# Altium PCB Auxboardone.PcbDoc
Units mil, origin at the board's own origin, x right, y up, seen from the top; angles counter-clockwise.
Board outline 3330 x 1865 mil, 2 copper layers (Top Layer, Bottom Layer); 27 components, 19 nets, 123 pads, 16 vias.
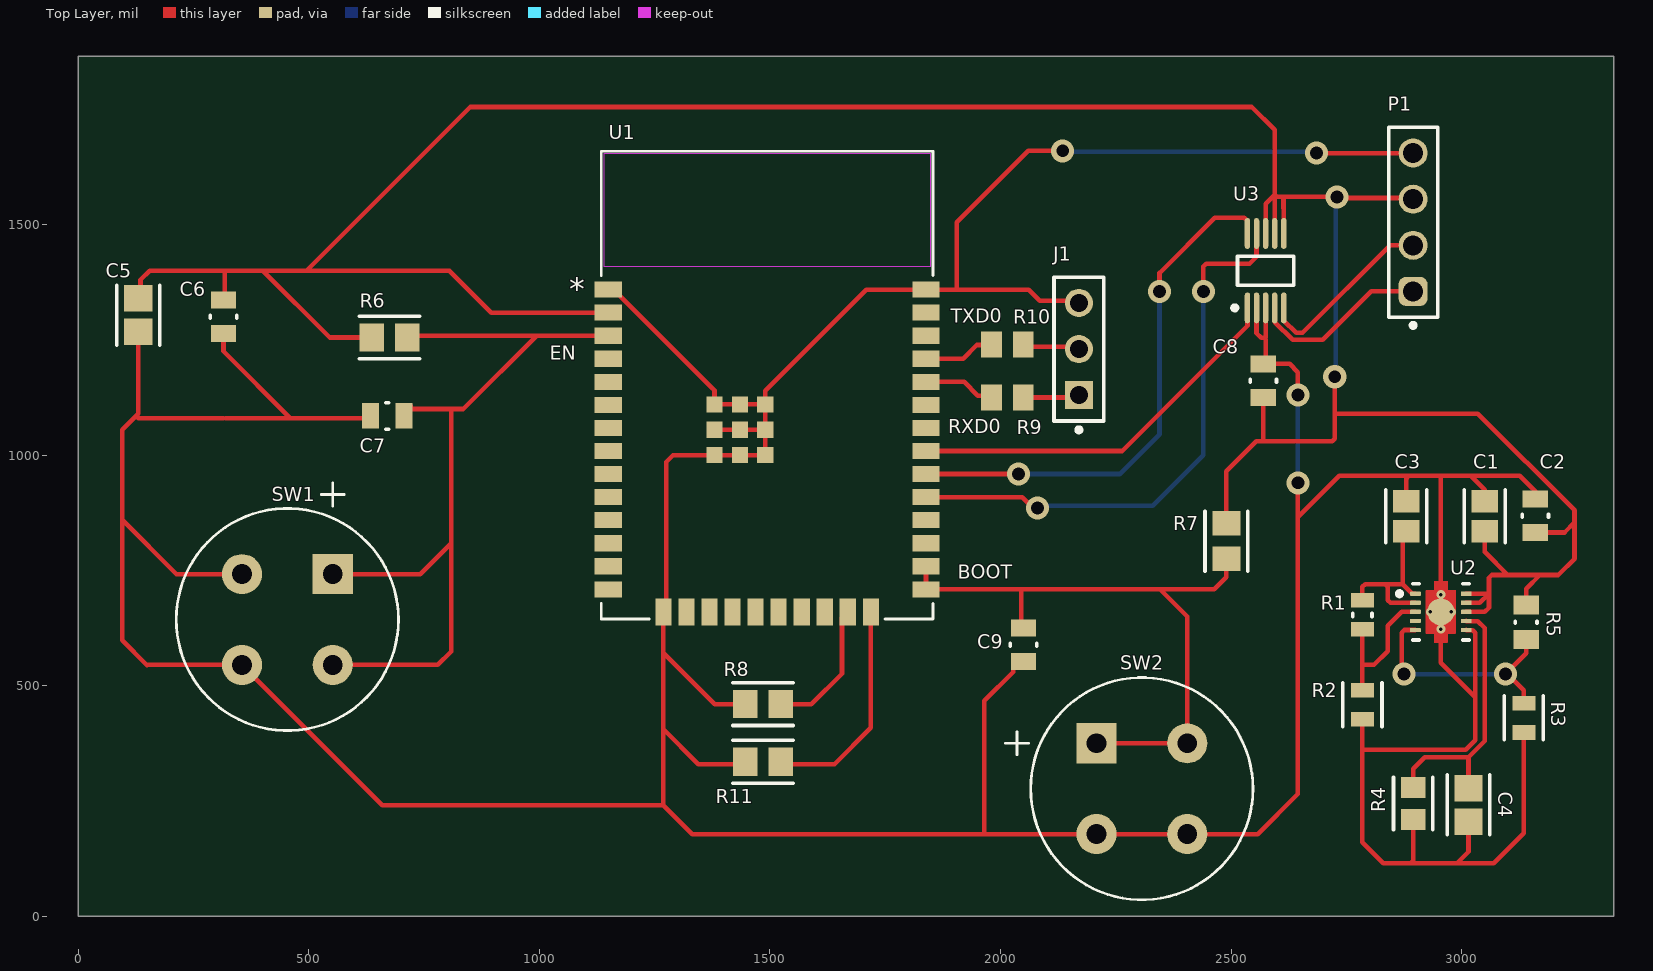
[diagram p0: Top Layer view]
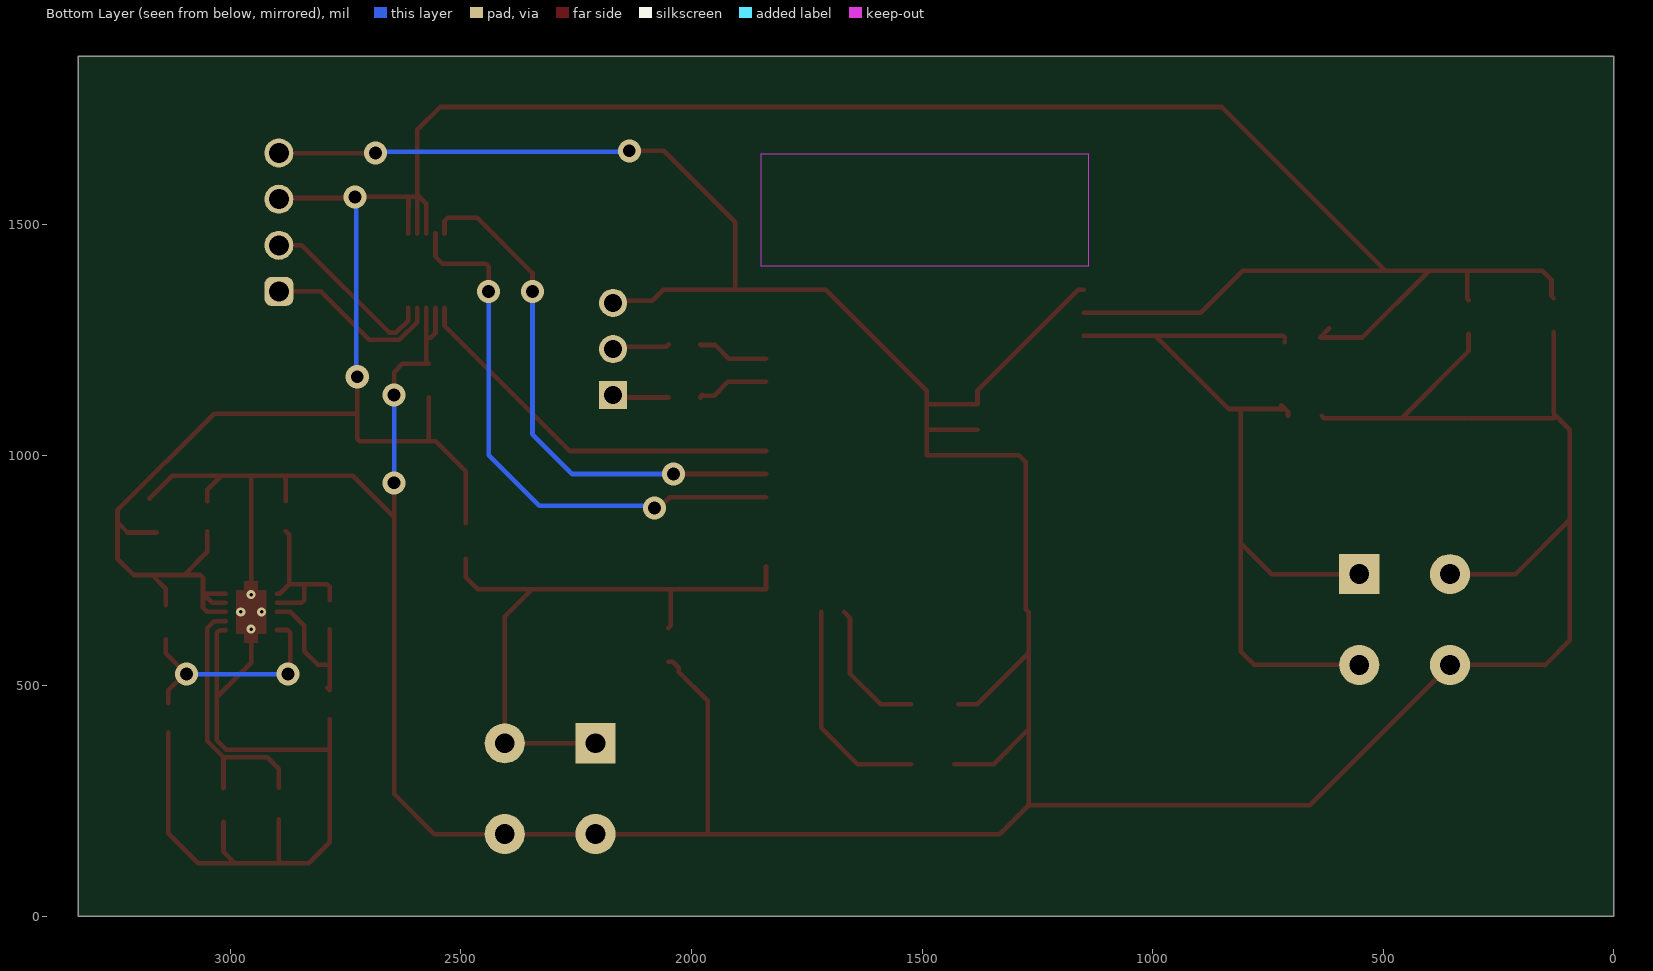
[diagram p1: Bottom Layer view, seen from below]
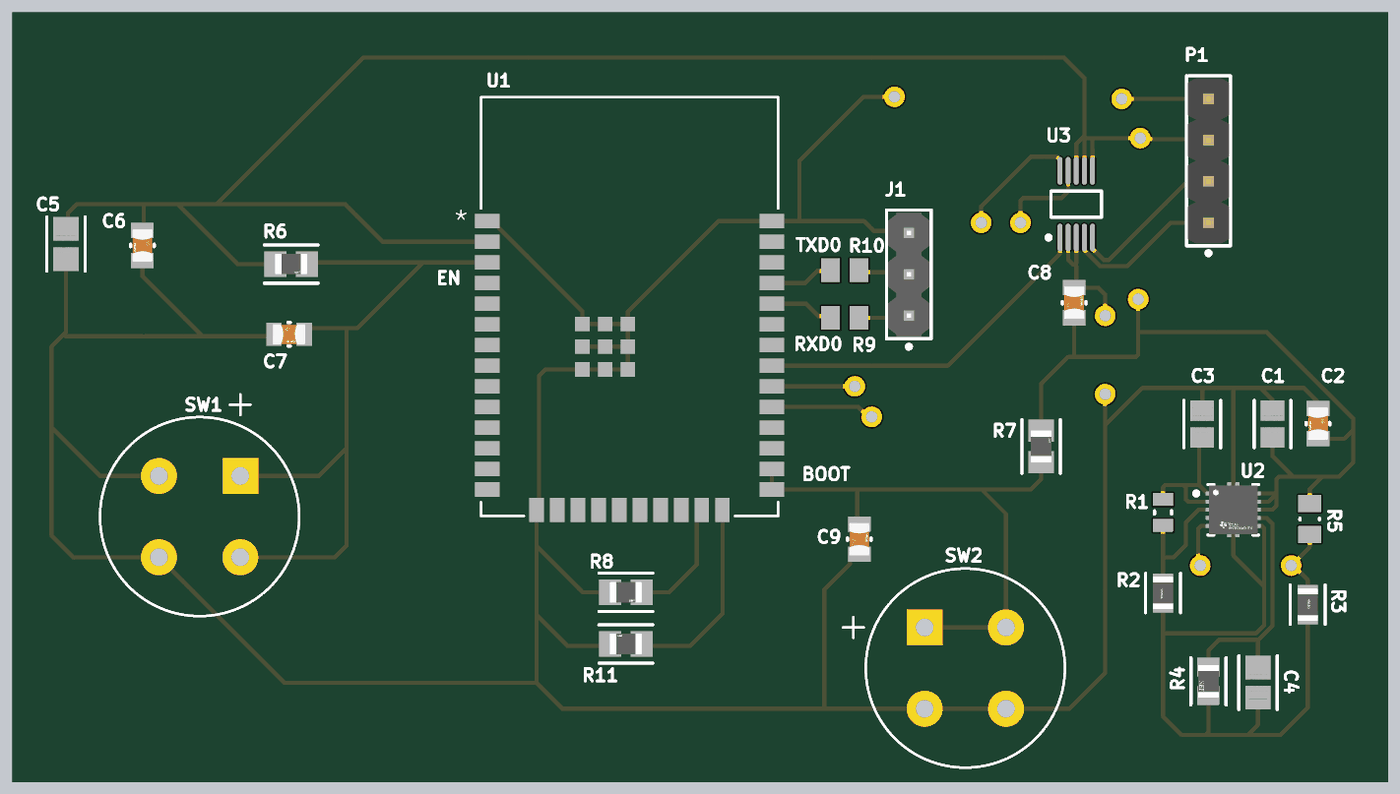
[diagram p2: 3D render of the assembled board from above, using the file's embedded part models]

## Layer stack, top to bottom
Top Solder: solder mask 0.4, Solder Resist, Dk 3.5
Top Layer: signal copper 1.4
Dielectric 1: dielectric 12.6, FR-4, Dk 4.8
Bottom Layer: signal copper 1.4
Bottom Solder: solder mask 0.4, Solder Resist, Dk 3.5

## Board outline
0,0 0,1865 3330,1865 3330,0

## Design rules (kind name [scope] priority, off if disabled: settings)
Clearance [All] p1: gap=5 ignorepadtopadclearanceinfootprint=FALSE
MinimumSolderMaskSliver [All] p1: minsoldermaskwidth=5
PolygonConnect [All] p1: connectstyle=Relief reliefconductorwidth=10 reliefentries=4 polygonreliefangle="90 Angle" airgapwidth=10
RoutingVias [All] p1: holewidth=15 width=35 viastyle="Through Hole" minholewidth=10 minwidth=30 maxholewidth=100 maxwidth=250
SilkToSilkClearance [All] p1: silktosilkclearance=5
SolderMaskExpansion [All] p1: expansion=4 istentingtop=FALSE
SupplyNets "Schematic Supply Nets_2" [InNet('+5')] p1: voltage=0.000
SupplyNets "Schematic Supply Nets_1" [InNet('+ 3.3')] p2: voltage=0.000
SupplyNets "Schematic Supply Nets" [InNet('GND')] p3: voltage=0.000
Width [All] p1: maxlimit=1000 minlimit=5 preferedwidth=10
28 further rules are at their usual default settings.

## Components (designator, comment, footprint, x,y, rotation, side; value= is the part's Value field where it differs from the comment)
C1 "CL21A106KOQNNNE" FP-CL21-IPC_B 3050,867.51 r270 top
C2 "CC0805KKX7R7BB105" FP-CC0805-0_85-MFG 3160,868.58 r270 top value="1 uF"
C3 "CL21A106KOQNNNE" FP-CL21-IPC_B 2880,867.49 r270 top
C4 "CL21A475KAQNNNE" FP-CL21-IPC_A 3015,241.45 r270 top
C5 "CL21A226MQQNNNE" FP-CL21-IPC_A 130,1303.55 r270 top
C6 "CC0805KRX7R9BB104" FP-CC0805-0_85-MFG 315,1300 r270 top value="100 nF"
C7 "CC0805KRX7R9BB104" FP-CC0805-0_85-MFG 670,1085 r0 top value="100 nF"
C8 "CC0805KRX7R9BB104" FP-CC0805-0_85-MFG 2570,1161.42 r90 top value="100 nF"
C9 "CC0805KRX7R9BB104" FP-CC0805-0_85-MFG 2050,588.58 r90 top value="100 nF"
J1 "PREC003SAAN-RC" FP-PREC003SAAN-RC-MFG 2170,1230 r90 top
P1 "61300411121" 61300411121 2895,1505 r90 top
R1 "RC0805FR-07226KL" RESC2013X60X35LL10T20 2785,653.5 r90 top
R2 "RC0805FR-07100KL" FP-RC0805-0_6-IPC_C 2785,458.43 r90 top
R3 "RC0805FR-07100KL" FP-RC0805-0_6-IPC_C 3135,430 r270 top
R4 "RMCF0805FT22K1" FP-RMCF0805-IPC_B 2895,244.48 r270 top
R5 "1M5 5% 0805(2012)" RESC0805(2012)_N 3140,637.6 r270 top value=1.5M
R6 "RR1220P-103-D" FP-RR1220-IPC_A 675,1255 r0 top
R7 "RR1220P-103-D" FP-RR1220-IPC_A 2490,813.41 r90 top
R8 "RR1220P-103-D" FP-RR1220-IPC_A 1485,460 r0 top
R9 "ERJ-6GEY0R00V" RESC2013X70X40NL20T20 2015,1125 r180 top
R10 "ERJ-6GEY0R00V" RESC2013X70X40NL20T20 2015,1240 r180 top
R11 "RR1220P-103-D" FP-RR1220-IPC_A 1485,335 r180 top
SW1 "D6R90F1LFS" D6R_CNK 551.85,741.85 r270 top
SW2 "D6R90F1LFS" D6R_CNK 2208.15,375 r0 top
U1 "ESP32-WROOM-32E-N16" ESP32-WROOM-32E_EXP 1493.94,1151.85 r0 top
U2 "TPS7A9401DSCR" FP-DSC0010J-MFG 2955,660 r0 top
U3 "ADS1018IDGSR" TI-DGS10_N 2575,1400 r90 top

## Footprints (in the part's own frame and the unit in brackets; to place one, negate y for a bottom-side part, rotate by r counter-clockwise, add the part's x,y. Pads: shape width x height; smd on the part's side, far side on the other; paste and mask are expansions set on the pad)
61300411121 [mm] "Pin Header, pitch 2.54 mm, THT, Vertical, single row, 4p"
  rrect50% 1.6x1.6 hole 1.1: 1(-3.81,0)
  round 1.6 hole 1.1: 2(-1.27,0) 3(1.27,0) 4(3.81,0)
  silkscreen extent -5.8,-1.35 5.23,1.35, body extent -5.08,-1.27 5.08,1.27, height 8.57
D6R_CNK [mil]
  rect 87x87 / inner round 60 / far side rect 87x87 hole 43 paste-99999 mask+0: 1(0,0)
  round 87 / inner round 60 / far side round 87 hole 43 paste-99999 mask+0: 2(0,-196.85) 3(196.85,-196.85) 4(196.85,0)
  silkscreen extent -198,-339 339,143
ESP32-WROOM-32E_EXP [mil]
  rect 59x35 smd paste+0 mask+0: 1(-344.49,207.09) 2(-344.49,157.09) 3(-344.49,107.09) 4(-344.49,57.09) 5(-344.49,7.09) 6(-344.49,-42.91) 7(-344.49,-92.91) 8(-344.49,-142.91) 9(-344.49,-192.91) 10(-344.49,-242.91) 11(-344.49,-292.91) 12(-344.49,-342.91) 13(-344.49,-392.91) 14(-344.49,-442.91) 25(344.49,-442.91) 26(344.49,-392.91) 27(344.49,-342.91) 28(344.49,-292.91) 29(344.49,-242.91) 30(344.49,-192.91) 31(344.49,-142.91) 32(344.49,-92.91) 33(344.49,-42.91) 34(344.49,7.09) 35(344.49,57.09) 36(344.49,107.09) 37(344.49,157.09) 38(344.49,207.09)
  rect 35x59 smd paste+0 mask+0: 15(-225,-492.13) 16(-175,-492.13) 17(-125,-492.13) 18(-75,-492.13) 19(-25,-492.13) 20(25,-492.13) 21(75,-492.13) 22(125,-492.13) 23(175,-492.13) 24(225,-492.13)
  rect 35x35 smd paste+0 mask+0: 39(-59.06,-96.85) 40(-114.17,-41.73) 41(-114.17,-96.85) 42(-114.17,-151.97) 43(-59.06,-151.97) 44(-3.94,-151.97) 45(-3.94,-96.85) 46(-3.94,-41.73) 47(-59.06,-41.73)
  Keep-Out Layer region: 354.5,502 -354.5,502 -354.5,258 354.5,258
  silkscreen extent -360,-507 360,507
FP-CC0805-0_85-MFG [mm]
  rect 0.95x1.4 smd paste+0 mask+0: 1(-0.925,0) 2(0.925,0)
  silkscreen extent -0.08,-0.72 0.08,0.72, body extent -1.6,-1.05 1.6,1.05, height 0.25
FP-CL21-IPC_A [mil]
  rect 57.27x61.27 smd paste+0 mask+0: 1(-36.45,0) 2(36.45,0)
  silkscreen extent -65,-46 65,46, body extent -85,-50 85,50, height 10
FP-CL21-IPC_B [mil]
  rect 49.4x57.33 smd paste+0 mask+0: 1(-32.51,0) 2(32.51,0)
  silkscreen extent -57,-44 57,44, body extent -67,-39 67,39, height 10
FP-DSC0010J-MFG [mm]
  rrect42% 0.6x0.24 smd paste+0 mask+0: 1(-1.4,1) 2(-1.4,0.5) 3(-1.4,0) 4(-1.4,-0.5) 5(-1.4,-1) 6(1.4,-1) 7(1.4,-0.5) 8(1.4,0) 9(1.4,0.5) 10(1.4,1)
  round 1.485 smd paste-1000 mask+0: 11(0,0)
  Top Layer region: -0.375,-1.2 -0.375,-1.65 -0.371,-1.669 -0.36,-1.685 -0.344,-1.696 -0.325,-1.7 -0.325,-1.7 -0.175,-1.7 -0.156,-1.696 -0.14,-1.685 -0.129,-1.669 -0.125,-1.65 -0.125,-1.65 -0.125,-1.2 0.125,-1.2 0.125,-1.65 0.129,-1.669 0.14,-1.685 0.156,-1.696 0.175,-1.7 0.175,-1.7 0.325,-1.7 0.344,-1.696 0.36,-1.685 0.371,-1.669 0.375,-1.65 0.375,-1.65 0.375,-1.2 0.775,-1.2 0.794,-1.196 0.81,-1.185 0.821,-1.169 0.825,-1.15 0.825,-1.15 0.825,1.15 0.818,1.175 0.8,1.193 0.775,1.2 0.775,1.2 0.375,1.2 0.375,1.65 0.368,1.675 0.35,1.693 0.325,1.7 0.325,1.7 0.175,1.7 0.156,1.696 0.14,1.685 0.129,1.669 0.125,1.65 0.125,1.65 0.125,1.2 -0.125,1.2 -0.125,1.65 -0.132,1.675 -0.15,1.693 -0.175,1.7 -0.175,1.7 -0.325,1.7 -0.344,1.696 -0.36,1.685 -0.371,1.669 -0.375,1.65 -0.375,1.65 -0.375,1.2 -0.775,1.2 -0.794,1.196 -0.81,1.185 -0.821,1.169 -0.825,1.15 -0.825,1.15 -0.825,-1.15 -0.821,-1.169 -0.81,-1.185 -0.794,-1.196 -0.775,-1.2 -0.775,-1.2 -0.775,-1.2
  silkscreen extent -2.4,-1.55 1.55,1.55, body extent -1.8,-1.8 1.8,1.8, height 0.25
FP-PREC003SAAN-RC-MFG [mm]
  rect 1.55x1.55 hole 1 paste-2539.97 mask+0: 1(-2.54,0)
  round 1.55 hole 1 paste-2539.97 mask+0: 2(0,0) 3(2.54,0)
  silkscreen extent -4.57,-1.37 3.96,1.37, body extent -4.06,-1.47 4.06,1.47, height 0.25
FP-RC0805-0_6-IPC_C [mil]
  rect 31.82x49.69 smd paste+0 mask+0: 1(-31.57,0) 2(31.57,0)
  silkscreen extent -47,-42 47,42, body extent -51,-31 51,31, height 10
FP-RMCF0805-IPC_B [mil]
  rect 45.46x53.63 smd paste+0 mask+0: 1(-34.48,0) 2(34.48,0)
  silkscreen extent -57,-43 57,43, body extent -67,-37 67,37, height 10
FP-RR1220-IPC_A [mil]
  rect 53.34x61.27 smd paste+0 mask+0: 1(-38.41,0) 2(38.41,0)
  silkscreen extent -65,-46 65,46, body extent -85,-50 85,50, height 10
RESC0805(2012)_N [mm] "Chip Resistor, Body 2.0x1.3mm, IPC Medium Density"
  rect 1.05x1.4 smd: 1(-0.95,0) 2(0.95,0)
  silkscreen extent -0.05,-0.6 0.05,0.6, body extent -1.1,-0.67 1.1,0.68, height 0.7
RESC2013X60X35LL10T20 [mm] "Chip Resistor, 2-Leads, Body 2.00x1.25mm, IPC High Density"
  rect 0.8x1.25 smd: 1(-0.8,0) 2(0.8,0)
  silkscreen extent -0.1,-0.53 0.1,0.53, body extent -1.05,-0.67 1.05,0.67, height 0.6
RESC2013X70X40NL20T20 [mm] "Chip Resistor, 2-Leads, Body 2.00x1.25mm, IPC Medium Density"
  rect 1.15x1.45 smd: 1(-0.875,0) 2(0.875,0)
  body extent -1.1,-0.72 1.1,0.72, height 0.7
TI-DGS10_N [mm] "SOP, 10-Leads, Body 3x3mm, Pitch 0.5mm, IPC Medium Density"
  oval 1.7x0.3 smd: 1(-2.05,1) 2(-2.05,0.5) 3(-2.05,0) 4(-2.05,-0.5) 5(-2.05,-1) 6(2.05,-1) 7(2.05,-0.5) 8(2.05,0) 9(2.05,0.5) 10(2.05,1)
  silkscreen extent -2.17,-1.55 0.8,1.82, body extent -1.55,-1.55 1.55,1.55, height 1.1

## Part data
C1 C3: library part CMP-2000-06102-2, "CL21 Series 0805 10uF 16V ±10% Tolerance X5R Multilayer Ceramic Chip Capacitor", Capacitance=10uF, Case Code (Imperial)=0805, Case Code (Metric)=2012, Dielectric=X7R, Max Operating Temperature=85°C, Min Operating Temperature=-55°C, Package Quantity=1, Tolerance=10%, Voltage=16V, Case/Package=0805, Depth=1.25mm, Height=1.25mm, Lead Free="Lead Free", Length=2mm, Mount="Surface Mount", Packaging="Tape and Reel", Radiation Hardening=No, Thickness=0.055inch, Voltage Rating=16V, Voltage Rating (DC)=16V, Width=0.049inch
C2: library part CMP-03422-000001-1, "CAP CER 1UF 16V X7R 0805", Capacitance="1 uF", Manufacturer=Yageo, Package=CC0805-0.85, Temperature="-30°C to +85°C", Temperature Characteristic=X7R, Temperature Range High=+85°C, Temperature Range Low=-30°C, Tolerance=0.1, Voltage Rating="16 V", Automotive=No, Category=Cap, ComponentLink2Description=Datasheet, ComponentLink2URL=http://www.yageo.com/documents/recent/UPY-GPHC_Y5V_6.3V-to-50V_8.pdf, Device Class L1="Passive Components", Device Class L2=Capacitors, Device Class L3="Ceramic Capacitors", Digikey Description="CAP CER 1UF 16V X7R 0805", Footprint Url=http://www.yageo.com/exep/pages/download/literatures/UPY-C_GEN_24.pdf, Height=0.95mm, Ipc Land Pattern Name=CAPC200125X85, Lead Free=Yes, Manufacturer Part Number=CC0805KKX7R7BB105, Material=Ceramic, Mouser Description="Multilayer Ceramic Capacitors MLCC - SMD/SMT 1.0uF 16V X7R 10%", Octopart=https://octopart.com/cc0805kkx7r7bb105-yageo-8376555, RoHS=TRUE
C4: library part CMP-13271-002624-1, "CL21 Series 0805 4.7uF 25V ±10% Tolerance X5R Multilayer Ceramic Chip Capacitor", Capacitance=4.7uF, Case Code (Imperial)=0805, Case Code (Metric)=2012, Dielectric=X5R, Max Operating Temperature=85°C, Min Operating Temperature=-55°C, Package Quantity=1, Tolerance=10%, Voltage Rating=25V, Case/Package=0805, Depth=1.25mm, Height=1.25mm, Lead Free="Lead Free", Length=2mm, Mount="Surface Mount", Packaging="Tape and Reel", Radiation Hardening=No, Thickness=0.055inch, Voltage Rating (DC)=25V, Width=0.049inch
C5: library part CMP-13271-000185-1, "CL21 Series 0805 22uF 6.3V ±20% Tolerance X5R Multilayer Ceramic Chip Capacitor", Capacitance=22uF, Case Code (Imperial)=0805, Case Code (Metric)=2012, Dielectric=X5R, Max Operating Temperature=85°C, Min Operating Temperature=-55°C, Package Quantity=2000, Tolerance=20%, Voltage Rating=6.3V, Case/Package=0805, Contact Plating=Tin, Depth=1.25mm, Height=1.25mm, Lead Free="Lead Free", Length=2mm, Mount="Surface Mount", Packaging="Tape and Reel", Radiation Hardening=No, Thickness=0.055inch, Voltage Rating (DC)=6.3V, Width=0.049inch
C6 C7 C8 C9: library part CMP-2100-03606-3, "CAP CER 0.1UF 50V X7R 0805", Capacitance="100 nF", Manufacturer=Yageo, Package=CC0805-0.85, Temperature="-30°C to +85°C", Temperature Characteristic=X7R, Temperature Range High=+85°C, Temperature Range Low=-30°C, Tolerance=0.1, Voltage Rating="50 V", Automotive=No, Category=Cap, ComponentLink2Description=Datasheet, ComponentLink2URL=http://www.yageo.com/documents/recent/UPY-GPHC_Y5V_6.3V-to-50V_8.pdf, Device Class L1="Passive Components", Device Class L2=Capacitors, Device Class L3="Ceramic Capacitors", Digikey Description="CAP CER 0.1UF 50V X7R 0805", Footprint Url=http://www.yageo.com/exep/pages/download/literatures/UPY-C_GEN_24.pdf, Height=0.95mm, Ipc Land Pattern Name=CAPC200125X85, Lead Free=Yes, Manufacturer Part Number=CC0805KRX7R9BB104, Material=Ceramic, Mouser Description="Multilayer Ceramic Capacitors MLCC - SMD/SMT 100nF 50V X7R 10%", Octopart=https://octopart.com/cc0805krx7r9bb104-yageo-192993, RoHS=TRUE
J1: library part CMP-00595-22265080-1, "PREC003SAAN-RC Conn Header Vert 3POS 2.54MM", Color=Black, Current Rating=3A, Max Operating Temperature=105°C, Min Operating Temperature=-40°C, Connector Type="Male Pin", Contact Material="Nickel, Tin", Contact Mating Length=5.842mm, Contact Plating=Tin, Height=8.74mm, Mount="Through Hole", NexarPartId=22265080, Number of Contacts=3, Number of Positions=3, Number of Rows=1, Packaging=Bulk, Pitch=2.54mm, RoHS=Compliant, Termination=Solder
P1: library part CMP-1502-01064-3, Color=Black, Contact Resistance=20mΩ, Current Rating=3A, Max Operating Temperature=105°C, Min Operating Temperature=-40°C, Operating Supply Voltage=250V, Connector Type="Male Pin", Contact Material=Copper, Contact Mating Length=5.9944mm, Contact Plating=Gold, Gender=Male, Height=8.89mm, Lead Free="Lead Free", Lead Pitch=2.54mm, Mount="Through Hole", NexarPartId=32855522, Number of Contacts=4, Number of Pins=4, Number of Positions=4, Number of Rows=1, Orientation=Vertical, Packaging=Bulk, Pitch=2.54mm, REACH SVHC=Unknown, RoHS=Compliant, Termination=Solder, Voltage Rating=250V
R1: library part CMP-2001-01015-1, Manufacturer=Yageo, Resistance=226K, Part Number=RC0805FR-07226KL
R2 R3: library part CMP-2100-03668-5, "RES 100K OHM 1% 1/8W 0805", Case Code (Imperial)=0805, Case Code (Metric)=2012, Max Operating Temperature=155°C, Max Power Dissipation=125mW, Min Operating Temperature=-55°C, Package Quantity=1, Resistance=100k, Resistance Tolerance=1%, Resistor Type="Thick Film", Temperature Coefficient=100ppm/°C, Voltage Rating=150V, Case/Package=0805, Construction=Rectangular, Depth=1.25mm, Features="Moisture Resistant", Height=0.024inch, Lead Free="Lead Free", Lead Pitch=0.4mm, Length=0.079inch, Military Standard=Not, Number of Pins=2, Number of Terminations=2, Packaging="Tape and Reel", Power Rating=125mW, RoHS Compliant=Yes, Series=RC, Size Code=0805, Technology="THICK FILM", Termination=SMD/SMT, Tolerance=1%, Voltage Rating (DC)=150V, Width=0.049inch
R4: library part CMP-26527-001411-1, "22.1kΩ ±1% 0.125W 0805 Thick Film Chip Resistor AEC-Q200 compliant", Case Code (Imperial)=0805, Case Code (Metric)=2012, Max Operating Temperature=155°C, Max Power Dissipation=125mW, Min Operating Temperature=-55°C, Resistance=22.1k, Resistor Type="Thick Film", Temperature Coefficient=100ppm/°C, Tolerance=1%, Case/Package=0805, Construction=Rectangular, Contact Plating=Tin, Depth=1.25mm, Features="Automotive AEC-Q200", Height=0.026inch, Lead Free="Lead Free", Length=0.079inch, Military Standard=Not, Mount="Surface Mount", Number of Terminations=2, Packaging="Tape and Reel", Power Rating=125mW, Radiation Hardening=No, RoHS Compliant=Yes, Series=RMCF, Size Code=0805, Width=0.049inch
R5: library part CMP-1013-00150-1, "1M5 0.125W 5% 0805 (2012 Metric)  SMD", Case-EIA=0805, Case-Metric=2012, Power="0.125 W", Tolerance="5 %", Technology=SMT
R6 R7 R8 R11: library part CMP-2001-03215-2, "10kΩ ±0.5% 0.1W 1/10W Chip Resistor 0805 (2012 Metric) Thin Film", Case Code (Imperial)=0805, Case Code (Metric)=2012, Max Operating Temperature=125°C, Max Power Dissipation=100mW, Min Operating Temperature=-55°C, Package Quantity=1, Resistance=10kR, Resistance Tolerance=0.5%, Resistor Type="Thin Film", Temperature Coefficient=25ppm/°C, Voltage Rating=100V, Case/Package=0805, Depth=1.25mm, Height=0.4mm, Lead Free="Lead Free", Length=2mm, Number of Terminations=2, Packaging="Tape and Reel", Power Rating=100mW, RoHS Compliant=Yes, Series=RR, Size Code=0805, Technology="THIN FILM", Termination=SMD/SMT, Tolerance=0.5%, Voltage Rating (DC)=100V, Weight=0.000194oz, Width=1.25mm
R9 R10: library part CMP-1665-00002-5, "Chip Resistor, 0 Ohm, +/- 1%, 0.125 W, -55 to 155 degC, 0805 (2012 Metric), RoHS, Tape and Reel", Case Code (Imperial)=0805, Case Code (Metric)=2012, Max Operating Temperature="155 degC", Min Operating Temperature="-55 degC", Package Quantity=5000, Resistance="0 Ohm", Tolerance=5%, Case/Package=0805, ComponentLink1Description="Manufacturer URL", ComponentLink1URL=http://www.panasonic.com/, ComponentLink2Description=Datasheet, ComponentLink2URL=http://industrial.panasonic.com/cdbs/www-data/pdf/RDA0000/AOA0000C84.pdf, DatasheetVersion=03/2015, Height="0.6 mm", Length="2 mm", Mounting Technology="Surface Mount", PackageDescription="2-Pin Surface Mount Device, Body 2 x 1.25 mm", Packaging="Tape and Reel", PartNumber=ERJ-6GEY0R00V, Radiation Hardening=No, REACH SVHC="No SVHC", RoHSCompliant=True, Width="1.25 mm"
SW1 SW2: "No Description Available", Mfr_Name="C&K Components", RefDes=RefDes, Type=Type
U1: "No Description Available", Mfr_Name="Espressif Systems", RefDes=RefDes, Type=RF
U2: library part CMP-04917-000380-1, "1-A, ULTRA-LOW NOISE, ULTRA-HIGH"
U3: library part CMP-0003-00373-2, "12-Bit ADC with Integrated MUX, PGA, Temperature Sensor, Oscillator and Reference, -40 to 125 degC, 10-pin SOP (DGS10), Green (RoHS & no Sb/Br)", Analog Voltage AV/DD(Max)(V)=5.5, Analog Voltage AV/DD(Min)(V)=2, Manufacturer="Texas Instruments", # Input Channels=4, Architecture=Delta-Sigma, Code_JEDEC=MO-153, ComponentLink1Description="Manufacturer URL", ComponentLink1URL=http://www.ti.com/, ComponentLink2Description=Datasheet, ComponentLink2URL=http://www.ti.com/lit/ds/symlink/ads1018.pdf, ComponentLink3Description="Package Specification", ComponentLink3URL=http://www.ti.com/lit/ml/mpds035b/mpds035b.pdf, DatasheetVersion=SBAS526A, Digital Supply(Max)(V)=5.5, Digital Supply(Min)(V)=2, Eco-Plan="Green (RoHS & no Sb/Br)", INL(Max)(+/-LSB)=0.5, Interface="Serial SPI", Mounting Technology="Surface Mount", PackageDescription="10-Pin Plastic Small Outline, Body 3 x 3 mm, Pitch 0.5 mm", PackageReference=DGS10, PackageVersion="4073272/C, 02/2004", PartNumber=ADS1018IDGSR, Resolution(Bits)=12, Sample Rate(max)(SPS)=3.3k, SubFamily="Precision ADC (<=10MSPS)"

## Via types
v1: diameter 50, hole 28, Top Layer to Bottom Layer, 12 vias
v2: diameter 19.68, hole 7.87, Top Layer to Bottom Layer, 4 vias

## Nets (pads, with @x,y where several pads share a name; then routed paths per layer and width w, separated by ;. In a path a pad name is that pad's centre, name@x,y a point inside that pad or via, vN(x,y) a via of type N, cw(c..) or ccw(c..) an arc to the next point about the centre after c; other vN are vias at no path point)
+5: C3.2 R1.2 U2.1 U2.2 | length 372.2
  Top Layer w10: R1.2 2785,714.14 2790.86,720 2834.14,720 ; C3.2 2872.72,827.69 2872.72,720 ; U2.2 2845.86,679.68 2840,685.54 2840,714.14 2834.14,720 ; U2.1 2893.35,699.37 2872.72,720 ; 2834.14,720 2872.72,720
"+ 3.3": C1.2 C2.2 C5.1 C6.1 C8.1 P1.3 R5.1 R6.1 R7.2 U1.2 U2.8 U2.9 U2.10 U3.6 U3.7 U3.8 | length 6887.5
  Top Layer w10: C5.1 135,1345 135,1380 155,1400 317.93,1400 ; C6.1 317.93,1339.35 317.93,1400 ; R6.1@616.59,1275 R6.1 545,1255 400,1400 ; U1.2 896.06,1308.94 805,1400 495,1400 ; R7.2 2490,965 2555,1030 2570,1030 ; C8.1 2570,1030 ; U3.8 2575,1545.32 2594.68,1565 ; U3.7 2594.68,1565 ; U3.6 2614.37,1534.37 2613.74,1535 2613.74,1556.26 2610,1560 ; v1(2725,1170) 2725,1090 ; P1.3 2892.5,1557.5 2732.5,1557.5 v1(2730,1560) 2610,1560 ; U2.8 3050,660 3059.37,669.37 3059.37,699.37 ; U2.9 3039.68,679.68 3059.37,699.37 ; U2.10 3059.37,699.37 ; C1.2 3050,790 3100,740 ; R5.1 3140,710 3170,740 ; C2.2 3223.11,832.17 3245,854.05 ; 317.93,1400 400,1400 ; 400,1400 495,1400 ; 495,1400 850,1755 2545,1755 2594.68,1705.32 2594.68,1565 ; 2570,1030 2719.14,1030 2725,1035.86 2725,1090 ; 2594.68,1565 2599.68,1560 2610,1560 ; 2725,1090 3035.4,1090 3245,880.4 3245,854.05 ; 3059.37,699.37 3059.37,734.14 3065.23,740 3100,740 ; 3100,740 3170,740 ; 3170,740 3210,740 3245,775 3245,854.05
  Bottom Layer w10: v1(2725,1170) 2727.5,1172.5 2727.5,1557.5 v1(2730,1560)
GND: C1.1 C2.1 C3.1 C4.2 C5.2 C6.2 C7.1 C8.2 C9.1 J1.3 P1.4 R2.1 R3.2 R4.2 R8.1 R11.2 SW1.2 SW1.3 SW2.2 SW2.3 U1.1 U1.15 U1.38 U1.39 U1.40 U1.41 U1.42 U1.43 U1.44 U1.45 U1.46 U1.47 U2.6 U2.11 U3.2 U3.3 | length 12937
  Top Layer w10: 130,1080 315,1080 ; C5.2 130,1090 95,1055 95,860 ; C6.2 315,1225 460,1080 ; 320,1080 460,1080 ; SW1.2@355,735 SW1.2 213.15,741.85 95,860 ; C7.1 628.58,1080 460,1080 ; U1.1 1161.45,1358.94 1375,1145.39 1375,1145 1379.76,1140.24 U1.40 U1.47 U1.46 ; U1.41 U1.39 U1.45 ; R8.1@1421.59,460 1380,460 1268.94,571.06 ; R11.2@1430.63,330 1345,330 1268.94,406.06 ; C9.1 2041.14,552.17 2027.44,538.46 2027.44,529.61 1965,467.17 1965,178.15 ; v1@2125,1660 2060,1660 1905,1505 1905,1358.94 ; J1.3@2170,1335 2085,1335 2061.06,1358.94 1905,1358.94 ; U3.2 2555.31,1264.69 2565.86,1254.14 2574.14,1254.14 2575,1255 U3.3 ; 2575,1250 2575,1202.83 C8.2 2627.17,1197.83 2645,1180 2645,1155 ; v1(2645,940) 2645,865 ; v1@2695,1655 P1.4 ; R2.1 2785,360 ; C3.1 2880,949.14 2885.86,955 ; R4.2 2895,120.86 2889.14,115 ; U2.6 3010.39,620.35 3024.65,620.35 3030,615 3030,475 ; C4.2 3015,140 2990,115 ; C1.1 3050,925 3020,955 ; R3.2 3135,180 3070,115 2990,115 ; C2.1@3176.14,905 3126.14,955 3020,955 ; 95,860 95,598.28 149.14,544.14 150,545 SW1.3 658.94,241.06 1268.94,241.06 ; 1268.94,241.06 1331.85,178.15 1965,178.15 ; 1268.94,241.06 1268.94,406.06 ; 1268.94,406.06 1268.94,571.06 ; 1268.94,571.06 U1.15 1275,665.79 1275,985 1289.88,999.88 U1.42 U1.43 U1.44 U1.45 ; U1.45 U1.46 ; U1.46 1490,1140 1708.94,1358.94 U1.38 1905,1358.94 ; 1965,178.15 SW2.2 SW2.3 2558.15,178.15 2645,265 2645,865 ; 2645,865 2735,955 2885.86,955 ; 2785,360 2785,160 2830,115 2889.14,115 ; 2785,360 2785.61,360.61 3009.39,360.61 3030,381.21 3030,475 ; 2885.86,955 2952.93,955 ; 2889.14,115 2990,115 ; 2952.93,955 3020,955 ; 2952.93,955 2955,952.93 v2(2955,697.4) U2.11 v2(2955,622.6) 2955,550 3030,475
  Bottom Layer w10: v1(2135,1660) 2137.5,1657.5 2682.5,1657.5 v1(2685,1655) ; v1(2645,940) v1(2645,1130)
  other v2: 2932.36,660 2977.64,660
NetC4_1: C4.1 R4.1 U2.7 | length 579.2
  Top Layer w10: R4.1 2895,320 2920,345 3015,345 ; U2.7 3010.39,640.04 3034.96,640.04 3050,625 3050,380 3015,345 ; C4.1 3015,345
NetC7_2: C7.2 R6.2 SW1.1 SW1.4 U1.3 | length 1906.5
  Top Layer w10: SW1.4 780,545 809.15,574.15 809.15,809.15 ; SW1.1 741.85,741.85 809.15,809.15 ; C7.2 706.42,1093.86 713.19,1100.63 720.12,1107.56 721.38,1107.56 713.82,1100 809.15,1100 ; R6.2@713.41,1245 R6.2@713.41,1247.27 ; R6.2 717.35,1258.94 993.94,1258.94 ; U1.3 993.94,1258.94 ; 809.15,809.15 809.15,1100 ; 809.15,1100 835,1100 993.94,1258.94
NetC9_2: C9.2 R7.1 SW2.1 SW2.4 U1.25 U1.26 | length 1393.6
  Top Layer w10: U1.26 U1.25 2045,708.94 ; C9.2 2045,630 2045,708.94 ; SW2.1 SW2.4 2405,650 2346.06,708.94 ; R7.1 2490,735 2463.94,708.94 2346.06,708.94 ; 2045,708.94 2346.06,708.94
NetJ1_1: J1.1 R9.1 | length 124.7
  Top Layer w10: R9.1 2160,1125 J1.1@2170,1135
NetJ1_2: J1.2 R10.1 | length 122.6
  Top Layer w10: R10.1 2054.45,1235 J1.2@2170,1235
NetP1_1: P1.1 U3.4 | length 390.3
  Top Layer w10: U3.4 2595.03,1318.94 2595.03,1288.58 2633.61,1250 2698.97,1250 2803.97,1355 P1.1
NetP1_2: P1.2 U3.5 | length 398
  Top Layer w10: U3.5 2614.37,1291.73 2641.1,1265 2655,1265 2845,1455 P1.2
NetR1_1: R1.1 R2.2 U2.3 | length 333.8
  Top Layer w10: R1.1 2785,545 ; R2.2@2790,495 R2.2 2785,545 ; U2.3 2870,660 2840,630 2840,575 2810,545 2785,545
NetR3_1: R3.1 R5.2 U2.5 | length 520.9
  Top Layer w10: v1(2875,525) 2870,530 2870,614.77 2875.86,620.63 U2.5 ; R3.1 3135,490 3100,525 v1(3095,525) 3140,570 R5.2
  Bottom Layer w10: v1(2875,525) v1(3095,525)
NetR8_2: R8.2 U1.23 | length 299
  Top Layer w10: R8.2 1590,460 1656.44,526.44 1656.44,647.22 U1.23
NetR11_1: R11.1 U1.24 | length 479
  Top Layer w10: R11.1@1523.41,330 1640,330 1718.94,408.94 U1.24
NetU1_29: U1.29 U3.9 | length 1217.7
  Top Layer w10: U1.29 2047.37,908.94 2071.31,885 v1(2080,885) ; 2440,1380 2440,1409.14 2445.86,1415 2540,1415 2555.31,1430.31 U3.9
  Bottom Layer w10: v1(2080,885) 2085,890 2330,890 2440,1000 v1(2440,1355)
NetU1_30: U1.30 U3.10 | length 1137.6
  Top Layer w10: U1.30 v1(2038.94,958.94) ; 2345,1380 2345,1395 2465,1515 2528.41,1515 2535.63,1507.78 U3.10
  Bottom Layer w10: v1(2038.94,958.94) 2258.94,958.94 2345,1045 v1(2345,1355)
NetU1_31: U1.31 U3.1 | length 848.4
  Top Layer w10: U1.31 2263.94,1008.94 2535.63,1280.63 U3.1
RXD0: R9.2 U1.34 | length 161.3
  Top Layer w10: U1.34 1921.06,1158.94 1950.9,1129.1 1976.45,1129.1 R9.2 ; R9.2@1976.65,1131.23 R9.2@1980.28,1127.6
TXD0: R10.2 U1.35 | length 155
  Top Layer w10: U1.35 1918.94,1208.94 1948.77,1238.77 1979.32,1238.77 R10.2
pads on no net: U1.4 U1.5 U1.6 U1.7 U1.8 U1.9 U1.10 U1.11 U1.12 U1.13 U1.14 U1.16 U1.17 U1.18 U1.19 U1.20 U1.21 U1.22 U1.27 U1.28 U1.32 U1.33 U1.36 U1.37 U2.4

## Silkscreen, mask and mechanical layers (free items; w line width, h text height)
Top Overlay:
  text "TXD0" at 1892,1287 h30
  text "EN" at 1022,1207 h30
  text "RXD0" at 1887,1047 h30
  text "BOOT" at 1907,732 h30
Mechanical 1:
  the board outline again, w10

## Text inside footprints (layer, text, board x,y; h text height)
U1: Mechanical 13 "*" at 1191.45,1333.94 h50; Top Overlay "*" at 1065,1335 h50